# Altium PCB wsg1.0.PcbDoc (part 2 of 3)
Units mm, origin at the board's own origin, x right, y up, seen from the top; angles counter-clockwise.
Board outline 55.37 x 28.61 mm, 4 copper layers (F.Cu, In1.Cu, In2.Cu, B.Cu); 38 components, 55 nets, 181 pads, 63 vias.
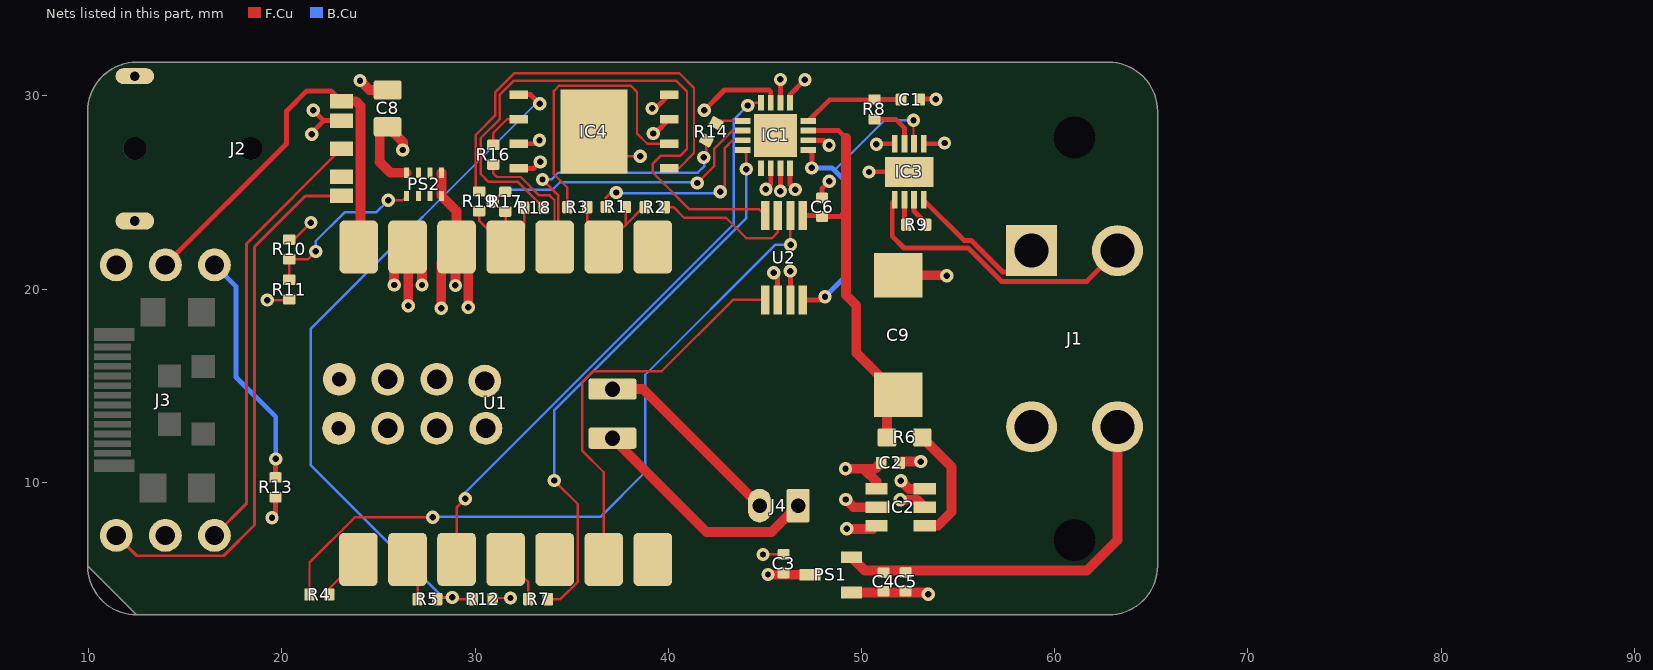
[diagram p4: the nets of this part, all layers, seen from the top]

## Design rules (kind name [scope] priority, off if disabled: settings) (continued)
27 further rules are at their usual default settings.

## Components (designator, comment, footprint, x,y, rotation, side; value= is the part's Value field where it differs from the comment)
C1 "10nF" C_0402_1005Metric 52.53,29.809 r0 top
C2 "0.1uF" C_0402_1005Metric 51.5,11.009 r0 top
C3 "1uF" C_0402_1005Metric 45.97,5.789 r90 top
C4 "1uF" C_0402_1005Metric 51.14,4.839 r270 top
C5 "10uF" C_0402_1005Metric 52.28,4.849 r270 top
C6 ".1uF" C_0402_1005Metric 47.96,24.229 r270 top
C8 "47uF" C_0805_2012Metric 25.47,29.349 r90 top
C9 "TAJD106M035RNJ" CAPPM7344X310N 51.9,17.619 r270 top
IC1 "ADS1120IRVAR" QFN50P350X350X100-17N-D 45.55,27.949 r90 top
IC2 "MCP1502T-50E_CHY" MCP1501-50 52.02,8.709 r180 top
IC3 "INA821IDRGR" SON50P300X300X80-9N-D 52.47,26.069 r90 top
IC4 "W25N04KVZEIR" SON127P800X600X80-9N-D 36.15,28.154 r0 top
J1 "ATF13-4P-BM13" DTF134PG003 58.8,21.989 r180 top
J2 "SJ-3541AS-SMT-TR-67" SJ3541ASSMTTR67 15.14,27.269 r0 top
J3 "USB_C_Plug_USB2.0" USB_C_PLACE 11.43,14.249 r90 top
J4 "Conn_01x02" JST_PH_S2B-PH-K_1x02_P2.00mm_Horizontal 46.72,8.789 r180 top
PS1 "AP2120N-2.5TRG1" SOT91P240X110-3N 48.4,5.209 r180 top
PS2 "TPSM83100SIUR" TPSM83100SIUR 27.36,25.419 r270 top
R1 "45.5" R_0402_1005Metric 37.28,24.249 r0 top
R2 "45.5" R_0402_1005Metric 39.3,24.239 r180 top
R3 "45.5" R_0402_1005Metric 35.29,24.239 r0 top
R4 "45.5" R_0402_1005Metric 21.94,4.189 r0 top
R5 "45.5" R_0402_1005Metric 27.53,3.949 r180 top
R6 "60" R_0603_1608Metric_Pad0.98x0.95mm_HandSolder 52.23,12.319 r0 top
R7 "45.5" R_0402_1005Metric 33.26,3.949 r180 top
R8 "1k" R_0402_1005Metric 50.67,29.299 r90 top
R9 "200" R_0402_1005Metric 52.83,23.329 r0 top
R10 "80.6k" R_0402_1005Metric 20.38,22.049 r270 top
R11 "806k" R_0402_1005Metric 20.38,19.969 r270 top
R12 "100k" R_0402_1005Metric 30.4,3.949 r180 top
R13 "5k" R_0402_1005Metric 19.67,9.739 r270 top
R14 "45.5" R_0402_1005Metric 42.22,28.139 r240 top
R16 "45.5" R_0402_1005Metric 30.94,26.949 r270 top
R17 "45.5" R_0402_1005Metric 31.56,24.519 r270 top
R18 "45.5" R_0402_1005Metric 33.05,24.199 r180 top
R19 "45.5" R_0402_1005Metric 30.21,24.539 r270 top
U1 "esp32 c6 xiao" "esp32 c6 smt" 31.558,14.291 r90 top
U2 "AD5626BRMZ" AD5626 45.99,21.619 r270 top

## Footprints (in the part's own frame and the unit in brackets; to place one, negate y for a bottom-side part, rotate by r counter-clockwise, add the part's x,y. Pads: shape width x height; smd on the part's side, far side on the other; paste and mask are expansions set on the pad)
AD5626 [mil]
  rect 59x17 smd mask+4.02: 1(-86,38) 2(-86,13) 3(-86,-13) 4(-86,-38) 5(86,-38) 6(86,-13) 7(86,13) 8(86,38)
  silkscreen extent -63,-63 63,63
C_0402_1005Metric [mm]
  rrect25% 0.56x0.62 smd mask+0: 1(-0.48,0) 2(0.48,0)
  silkscreen extent -0.11,-0.36 0.11,0.36
C_0805_2012Metric [mm]
  rrect25% 1x1.45 smd mask+0: 1(-0.95,0) 2(0.95,0)
  silkscreen extent -0.26,-0.73 0.26,0.73
CAPPM7344X310N [mm]
  rect 2.3x2.5 smd mask+0: 1(-3.1,0) 2(3.1,0)
  silkscreen extent -4.25,-2.17 3.65,2.17
DTF134PG003 [mm]
  rect 2.64x2.64 hole 1.76 paste-2539.97 mask+0: 1(0,0)
  round 2.64 hole 1.76 paste-2539.97 mask+0: 2(-4.45,0) 3(-4.45,9.12) 4(0,9.12)
  round 2.16 hole 2.16 paste-2539.97 mask+0: Un1(-2.223,14.974) Un2(-2.223,-5.856)
  silkscreen extent -30.1,-6.11 3.9,15.23
"esp32 c6 smt" [mm]
  rrect25% 2.75x2 smd mask+0.051: 1(-8.282,7.598) 2(-8.282,5.058) 3(-8.282,2.518) 4(-8.282,-0.022) 5(-8.282,-2.562) 6(-8.282,-5.102) 7(-8.282,-7.642) 8(7.883,-7.642) 9(7.883,-5.102) 10(7.883,-2.562) 11(7.883,-0.022) 12(7.883,2.518) 13(7.883,5.058) 14(7.883,7.58)
  rrect25% 1.1x2.5 hole 0.8 paste-2539.97 mask+0.051: 15(-2.008,-5.553) 16(0.532,-5.553)
  round 1.7 hole 0.762 paste-2539.97 mask+0: 17(-1.5,8.62) 18(1.04,8.592)
  round 1.7 hole 1 paste-2539.97 mask+0: 19(-1.5,6.08) 20(1.04,6.08) 21(-1.5,3.54) 22(1.04,3.54) 23(-1.5,1) 24(0.947,1.057)
  silkscreen extent -9.84,-10.44 8.66,12.69
JST_PH_S2B-PH-K_1x02_P2.00mm_Horizontal [mm]
  rrect21% 1.2x1.75 hole 0.75 paste-2539.97 mask+0: 1(0,0)
  rrect100% 1.2x1.75 hole 0.75 paste-2539.97 mask+0: 2(2,0)
  silkscreen extent -2.06,-6.36 4.06,1.46
MCP1501-50 [mm]
  rect 1.15x0.6 smd mask+0: 1(-1.25,0.95) 2(-1.25,0) 3(-1.25,-0.95) 4(1.25,-0.95) 5(1.25,0) 6(1.25,0.95)
  silkscreen extent -1.83,-1.45 0.33,1.6
QFN50P350X350X100-17N-D [mm]
  rect 0.8x0.3 smd mask+0: 1(-1.7,0.75) 2(-1.7,0.25) 3(-1.7,-0.25) 4(-1.7,-0.75) 9(1.7,-0.75) 10(1.7,-0.25) 11(1.7,0.25) 12(1.7,0.75)
  rect 0.3x0.8 smd mask+0: 5(-0.75,-1.7) 6(-0.25,-1.7) 7(0.25,-1.7) 8(0.75,-1.7) 13(0.75,1.7) 14(0.25,1.7) 15(-0.25,1.7) 16(-0.75,1.7)
  rect 2.24x2.24 smd mask+0: 17(0,0)
  silkscreen extent -2.22,1.37 -1.98,1.62
R_0402_1005Metric [mm]
  rrect25% 0.54x0.64 smd mask+0: 1(-0.51,0) 2(0.51,0)
  silkscreen extent -0.15,-0.38 0.15,0.38
R_0603_1608Metric_Pad0.98x0.95mm_HandSolder [mm]
  rrect25% 0.975x0.95 smd mask+0: 1(-0.913,0) 2(0.913,0)
  silkscreen extent -0.25,-0.52 0.25,0.52
SJ3541ASSMTTR67 [mm]
  rect 1.2x0.75 smd mask+0: 1(7.95,2.45) 2(7.95,-1.45) 3(7.95,0) 4(7.95,-2.45) 5(7.95,1.45)
  rrect100% 2x0.822 hole 0.5 slot 1.2 at 0 deg paste-2539.97 mask+0: MH1(-2.75,3.75)
  rrect100% 2x0.898 hole 0.5 slot 1.2 at 0 deg paste-2539.97 mask+0: MH2(-2.75,-3.75)
  round 1.2 hole 1.2 paste-2539.97 mask+0: Un1(-2.75,0) Un2(3.25,0)
  silkscreen extent -5.65,-4.4 9,4.4
SON50P300X300X80-9N-D [mm]
  rect 0.9x0.3 smd mask+0: 1(-1.45,0.75) 2(-1.45,0.25) 3(-1.45,-0.25) 4(-1.45,-0.75) 5(1.45,-0.75) 6(1.45,-0.25) 7(1.45,0.25) 8(1.45,0.75)
  rect 1.55x2.5 smd mask+0: 9(0,0)
  silkscreen extent -2.02,1.27 -1.78,1.52
SON127P800X600X80-9N-D [mm]
  rect 0.95x0.45 smd mask+0: 1(-3.9,1.905) 2(-3.9,0.635) 3(-3.9,-0.635) 4(-3.9,-1.905) 5(3.9,-1.905) 6(3.9,-0.635) 7(3.9,0.635) 8(3.9,1.905)
  rect 3.45x4.35 smd mask+0: 9(0,0)
  silkscreen extent -4.5,2.51 -4.25,2.75
SOT91P240X110-3N [mm]
  rect 1.09x0.61 smd mask+0.102: 1(-1.07,0.915) 2(-1.07,-0.915) 3(1.07,0)
  silkscreen extent -2.44,-1.45 0.65,1.45
TPSM83100SIUR [mm]
  rect 0.53x0.26 smd mask+0: 1(-0.6,0.9) 2(-0.6,0.3) 3(-0.6,-0.3) 4(-0.6,-0.9) 5(0.6,-0.9) 6(0.6,-0.3) 7(0.6,0.3) 8(0.6,0.9)
  silkscreen extent -1.5,0.85 -1.4,0.95
USB_C_PLACE [mm]
  round 1.7 hole 1 paste-2539.97 mask+0: 1(-7,0) 2(-7,-2.54) 3(-7,-5.08) 4(7,0) 5(7,-2.54) 6(7,-5.08)
  rect 0.35x1.9 smd mask+0: A1(2.75,0.2) A4(1.25,0.2) A5(0.75,0.2) A6(0.25,0.2) A7(-0.25,0.2) A10(-1.75,0.2) A11(-2.25,0.2) B2(-2.75,0.2) B3(-1.25,0.2) B5(-0.75,0.2) B9(1.75,0.2) B12(2.25,0.2)
  rect 1.5x1.4 smd mask+0: S1(-4.55,-4.4) S1(-4.55,-1.9) S1(4.55,-4.4)
  rect 0.65x2.1 smd mask+0: S1(-3.4,0.1) S1(3.4,0.1)
  rect 1.2x1.2 smd mask+0: S1(-1.75,-4.5) S1(-1.25,-2.75) S1(1.25,-2.75) S1(1.75,-4.5)
  rect 1.5x1.3 smd mask+0: S1(4.55,-1.9)
  silkscreen extent -4.2,-5.6 4.2,0.25

## Part data
C1 C2 C3 C4 C5 C6 C8: library part C, Sheetfile=wsg1.0.kicad_sch, ki_description="Unpolarized capacitor", ki_keywords="cap capacitor"
C9: Manufacturer_Name="Kyocera AVX", Mouser Part Number=581-TAJD106M035R, Height=3.1, Manufacturer_Part_Number=TAJD106M035RNJ, Mouser Price/Stock=https://www.mouser.co.uk/ProductDetail/KYOCERA-AVX/TAJD106M035RNJ?qs=srZBJ3srS4AUaIC0Brj4CQ%3D%3D, Sheetfile=wsg1.0.kicad_sch, ki_description="Tantalum Capacitors - Solid SMD 35volts 10uF 20%"
IC1: Manufacturer_Name="Texas Instruments", Mouser Part Number=595-ADS1120IRVAR, Height=1, Manufacturer_Part_Number=ADS1120IRVAR, Mouser Price/Stock=https://www.mouser.co.uk/ProductDetail/Texas-Instruments/ADS1120IRVAR?qs=%2Fd%252BFzHvH4c2AzmjDnnpHRQ%3D%3D, Sheetfile=wsg1.0.kicad_sch, ki_description="16-bit, 2-kSPS, 4-ch, low-power, small-size delta-sigma ADC with PGA, VREF, 2x IDACs & SPI interface"
IC2: library part MCP1501T-50E_CHY, Manufacturer_Name=Microchip, Manufacturer_Part_Number=MCP1501T-50E/CHY, Mouser Part Number=579-MCP1501T-50E/CHY, Height=1.45, Mouser Price/Stock=https://www.mouser.co.uk/ProductDetail/Microchip-Technology/MCP1501T-50E-CHY?qs=Li%252BoUPsLEnt6h%2FnXwes%252BxQ%3D%3D, Sheetfile=wsg1.0.kicad_sch, ki_description="Series Voltage Reference IC Fixed 5V V +/-0.1% 20 mA SOT-23-6"
IC3: Manufacturer_Name="Texas Instruments", Mouser Part Number=595-INA821IDRGR, Description="Instrumentation Amplifiers High bandwidth (4.7MHz), low noise (7nV/vHz), precision (35 V), low-power, instrumentation amp", Height=0.8, Manufacturer_Part_Number=INA821IDRGR, Mouser Price/Stock=https://www.mouser.co.uk/ProductDetail/Texas-Instruments/INA821IDRGR?qs=LDGDZb5k%2F%252B%2Foo4X%252BEQr4FA%3D%3D, Sheetfile=wsg1.0.kicad_sch, ki_description="Instrumentation Amplifiers High bandwidth (4.7MHz), low noise (7nV/vHz), precision (35 V), low-power, instrumentation amp"
IC4: Manufacturer_Name=Winbond, Mouser Part Number=454-W25N04KVZEIR, Height=0.8, Manufacturer_Part_Number=W25N04KVZEIR, Mouser Price/Stock=https://www.mouser.co.uk/ProductDetail/Winbond/W25N04KVZEIR?qs=YwPsRIUVAOdveyibmg1m8Q%3D%3D, Sheetfile=wsg1.0.kicad_sch, ki_description="FLASH - NAND Memory IC 4Gbit SPI - Quad I/O 104 MHz 8-WSON (8x6)"
J1: library part DTF13-4P-G003, Manufacturer_Name="TE Connectivity", Mouser Part Number=571-DTF13-4P-G003, Height=23.52, Manufacturer_Part_Number=DTF13-4P-G003, Mouser Price/Stock=https://www.mouser.co.uk/ProductDetail/TE-Connectivity-DEUTSCH/DTF13-4P-G003?qs=cgQJD%2FpJz0wMj4JqThO4Bw%3D%3D, Sheetfile=wsg1.0.kicad_sch, ki_description="Body Features: Primary Product Color Black | Configuration Features: Number of Sections 1 | Number of Rows 2 | Number of Positions 4 | PCB Mount Orientation Right Angle | Number of Signal Positions 4 | Contact Features: Mating Pin Diameter .063 INCH | Contact Type Pin | Contact Mating Area Plating Material Gold | Contact Current Rating (Max) 13 AMP | Contact Size Size 16 | Mating Pin Diameter 1.59 MM | Dimensions: Connector Width 27.18 MM | PCB Thickness (Recommended) .78  2.36 MM | Connector Length 1.31"
J2: Manufacturer_Name="Same Sky", Arrow Part Number=SJ-3541AS-SMT-TR-67, Arrow Price/Stock=https://www.arrow.com/en/products/sj-3541as-smt-tr-67/cui-devices, Height=5.65, Manufacturer_Part_Number=SJ-3541AS-SMT-TR-67, Sheetfile=wsg1.0.kicad_sch, ki_description="Stereo Jack, IP67, 3.5, 5 conductor, smt,  no switches, shield, T&R package"
J3: library part UCB_C_PLACE, Sheetfile=wsg1.0.kicad_sch
PS1: library part AP2120N-5.0TRG1, Manufacturer_Name="Diodes Incorporated", Mouser Part Number=621-AP2120N-5.0TRG1, Height=1.2, Manufacturer_Part_Number=AP2120N-5.0TRG1, Mouser Price/Stock=https://www.mouser.co.uk/ProductDetail/Diodes-Incorporated/AP2120N-5.0TRG1?qs=M%2FOdCRO8QQ3JQu49DdtyIA%3D%3D, Sheetfile=wsg1.0.kicad_sch, ki_description="Lin Reg 5V 150MA SOT23 for wsg"
PS2: Manufacturer_Name="Texas Instruments", Mouser Part Number=595-TPSM83100SIUR, Height=1.2, Manufacturer_Part_Number=TPSM83100SIUR, Mouser Price/Stock=https://www.mouser.co.uk/ProductDetail/Texas-Instruments/TPSM83100SIUR?qs=17ckDYBRdembJwsYYPsw7Q%3D%3D, Sheetfile=wsg1.0.kicad_sch, ki_description="5.5v Boost Converter for wsg"
R1 R2 R3 R4 R5 R6 R7 R8 R9 R10 R11 R12 R13 R14 R16 R17 R18 R19: library part R, Sheetfile=wsg1.0.kicad_sch, ki_description=Resistor, ki_keywords="R res resistor"
U1: library part 102010388, MANUFACTURER="Seeed Technology", MAXIMUM_PACKAGE_HEIGHT=N/A, Package=None, Availability="In Stock", Check_prices=https://www.snapeda.com/parts/102010388/Seeed+Studio/view-part/?ref=eda, Description="\n                        \n                            Seeeduino XIAO Development Board, Pre-Soldered [Seeed Studio] 102010388 Seeeduino XIAO Development Board, Pre-Soldered\n                        \n", MF="Seeed Technology Co., Ltd", MP=102010388, PARTREV=N/A, Price=None, SNAPEDA_PN=102010388, STANDARD="Manufacturer Recommendations", Sheetfile=wsg1.0.kicad_sch, SnapEDA_Link=https://www.snapeda.com/parts/102010388/Seeed+Studio/view-part/?ref=snap
J4: Sheetfile=wsg1.0.kicad_sch, ki_description="Generic connector, single row, 01x02, script generated (kicad-library-utils/schlib/autogen/connector/)", ki_keywords=connector
U2: Sheetfile=wsg1.0.kicad_sch, ki_description="DAC for wsg, main", ki_keywords=AD5626BRMZ

## Via types
v1: diameter 0.686, hole 0.33, F.Cu to B.Cu, tented both sides, 63 vias

## Nets (pads, with @x,y where several pads share a name; then routed paths per layer and width w, separated by ;. In a path a pad name is that pad's centre, name@x,y a point inside that pad or via, vN(x,y) a via of type N, cw(c..) or ccw(c..) an arc to the next point about the centre after c; other vN are vias at no path point)
"2V5 Ref": C4.1 C5.1 IC1.9 J1.3 PS1.2 | length 22.1
  F.Cu w0.254: IC1.9@46.3,29.649 46.3,30.059 v1(47.07,30.829)
  F.Cu w0.508: PS1.2@49.47,6.124 50.165,5.429 61.677,5.429 63.25,7.002 J1.3@63.25,12.869
3V3: IC1.11 IC4.3 IC4.7 IC4.8 PS2.1 PS2.8 R12.1 U1.12 | length 21.8
  F.Cu w0.127: R12.1@30.91,3.949 30.97,4.009 v1(31.83,4.009)
  F.Cu w0.254: IC4.3@32.25,27.519 33.15,27.519 v1(33.33,27.699) ; v1(39.16,29.349) 39.34,29.349 IC4.8@40.05,30.059 ; v1(39.22,28.052) 39.313,28.052 IC4.7@40.05,28.789 ; v1(41.863,29.259) 42.907,30.303 45.204,30.303 45.3,30.207 IC1.11@45.3,29.649
  F.Cu w0.508: v1(28.25,19.009) 28.25,21.384 U1.12@28.98,22.114 ; PS2.1@28.26,26.019 PS2.8@28.26,24.819 29.04,24.039 U1.12@29.04,22.174 ; v1(28.98,20.189) U1.12@28.98,22.114 ; v1(29.65,19.059) 29.65,21.564 U1.12@29.04,22.174 ; U1.12@28.98,22.114 U1.12@29.04,22.174
5V5: C2.1 C3.1 C8.1 IC1.10 IC2.4 IC2.6 IC3.8 PS1.3 PS2.4 R11.2 U2.6 | length 17
  F.Cu w0.127: v1(19.24,19.429) 20.35,19.429 R11.2@20.38,19.459
  F.Cu w0.254: v1(45.46,20.839) 45.66,20.639 U2.6@45.66,19.435 ; IC1.10@45.8,29.649 v1(45.8,30.849) ; v1(50.77,27.489) 50.8,27.519 IC3.8@51.72,27.519
  F.Cu w0.508: v1(26.26,27.199) 26.26,27.609 C8.1@25.47,28.399 25.06,27.989 25.06,26.599 25.05,26.589 25.62,26.019 PS2.4@26.46,26.019 ; v1(45.16,5.229) 45.18,5.209 PS1.3@47.33,5.209 ; v1(49.17,10.699) 50.11,10.699 ; v1(49.23,7.589) 50.6,7.589 IC2.6@50.77,7.759 ; IC2.4@50.77,9.659 50.77,10.039 50.11,10.699 ; C2.1@51.02,11.009 50.71,10.699 50.11,10.699
"5V Reference": C6.2 C9.2 IC1.7 R6.1 U2.1 | length 21.3
  F.Cu w0.254: U2.1@46.955,23.804 47.906,23.804 C6.2@47.96,23.749 49.051,23.749 49.106,23.804 ; IC1.7@47.25,28.199 48.82,28.199 49.19,27.829
  F.Cu w0.508: 49.106,23.804 49.19,23.719 ; 49.19,27.829 49.19,23.719 ; R6.1@51.317,12.319 51.317,13.937 C9.2@51.9,14.519 49.73,16.689 49.73,19.159 49.19,19.699 49.19,23.719
"5V USB": J2.1 J3.5 U1.14 | length 22.5
  F.Cu w0.254: J3.5@13.97,21.249 20.24,27.519 20.24,29.209 21.29,30.259 22.55,30.259 J2.1@23.09,29.719 J2.1@23.573,29.719
  F.Cu w0.508: J2.1@23.573,29.719 23.827,29.719 24.071,29.475 24.071,22.267 U1.14@23.978,22.174
"ADC DReady": IC1.12 U1.3 | length 30.5
  F.Cu w0.127: U1.3@29.04,6.009 29.04,8.699 v1(29.49,9.149) ; v1(44.11,29.499) 44.26,29.649 IC1.12@44.8,29.649
  B.Cu w0.127: v1(29.49,9.149) 29.49,9.476 43.393,23.38 43.393,28.783 v1(44.11,29.499)
AmplifiedSig: IC3.7 R8.1 | length 2.6
  F.Cu w0.254: R8.1@50.67,28.789 51.775,28.789 52.22,28.345 IC3.7@52.22,27.519
BAT+: J4.2 U1.16 | length 10.1
  F.Cu w0.508: U1.16@37.112,14.823 38.686,14.823 J4.2@44.72,8.789
BAT-: J4.1 U1.15 | length 12.2
  F.Cu w0.508: U1.15@37.112,12.283 41.975,7.419 45.35,7.419 J4.1@46.72,8.789
CS-ADC: IC1.16 R7.1 | length 29
  F.Cu w0.127: R7.1@33.77,3.949 34.419,3.949 35.311,4.841 35.311,8.869 v1(34.09,10.089) ; IC1.16@43.85,27.199 44.03,27.019 v1(44.03,26.209)
  B.Cu w0.127: v1(34.09,10.089) 34.09,13.717 44.03,23.657 v1(44.03,26.209)
CS-DAC: R4.1 U2.2 | length 37.8
  F.Cu w0.127: R4.1@21.43,4.189 21.43,5.838 23.781,8.189 v1(27.81,8.189) ; U2.2@46.32,23.804 46.32,22.309 v1(46.33,22.299)
  B.Cu w0.127: v1(27.81,8.189) 27.83,8.209 36.49,8.209 38.804,10.523 38.804,15.563 45.54,22.299 v1(46.33,22.299)
CS-MEM: IC4.1 R5.1 R12.2 | length 37.1
  F.Cu w0.127: R5.1@28.04,3.949 28.13,4.039 v1(28.82,4.039) 28.91,3.949 R12.2@29.89,3.949
  F.Cu w0.254: IC4.1@32.25,30.059 32.87,30.059 v1(33.34,29.589)
  B.Cu w0.127: v1(28.82,4.039) 28.34,4.039 21.49,10.889 21.49,17.939 33.14,29.589 v1(33.34,29.589)
"DAC Bias": IC1.5 IC3.6 U2.8 | length 17
  F.Cu w0.127: v1(52.69,28.739) 52.69,27.549 IC3.6@52.72,27.519
  F.Cu w0.254: U2.8@46.955,19.435 47.946,19.435 v1(48.11,19.599) ; IC1.5@47.25,27.199 47.43,27.019 v1(47.43,26.269)
  B.Cu w0.127: 48.602,26.151 51.19,28.739 v1(52.69,28.739)
  B.Cu w0.254: v1(47.43,26.269) 48.484,26.269 48.602,26.151 49.12,25.633 49.12,20.609 v1(48.11,19.599)
FilteredSig: C1.1 IC1.8 R8.2 | length 5.3
  F.Cu w0.254: IC1.8@47.25,28.699 48.35,29.799 50.66,29.799 R8.2@50.67,29.809 C1.1@52.05,29.809
GNDA: C1.2 C2.2 C3.2 C4.2 C5.2 C6.1 C8.2 C9.1 IC1.2 IC1.3 IC1.4 IC1.6 IC2.2 IC2.3 IC2.5 IC3.5 IC3.9 IC4.4 IC4.9 J1.4 J2.5 J3.2 J3.4 PS1.1 PS2.2 PS2.3 PS2.6 PS2.7 R10.1 R13.2 U1.13 U2.7 | length 43.2
  F.Cu w0.127: R10.1@20.38,22.559 20.62,22.559 v1(21.5,23.439) ; IC4.9@36.15,28.154 37.425,26.879 v1(38.55,26.879) ; v1(44.9,6.259) 44.91,6.269 C3.2@45.97,6.269
  F.Cu w0.254: v1(19.49,8.159) 19.67,8.339 R13.2@19.67,9.229 ; v1(21.54,28.009) 21.54,28.099 22.16,28.719 ; v1(21.62,29.259) 22.16,28.719 ; J2.5@23.09,28.719 22.16,28.719 ; IC4.4@32.25,26.249 33.04,26.249 v1(33.373,26.582) ; v1(45.05,25.169) 45.3,25.419 IC1.2@45.3,26.249 ; v1(45.8,25.069) IC1.3@45.8,26.249 ; IC1.4@46.3,26.249 46.3,25.419 v1(46.57,25.149) ; v1(46.31,20.929) 46.32,20.919 U2.7@46.32,19.435 ; IC1.6@47.25,27.699 48.07,27.699 v1(48.32,27.449) ; C6.1@47.96,24.709 47.96,25.209 v1(48.33,25.579) ; v1(50.39,26.059) 50.4,26.069 IC3.9@52.47,26.069 ; C1.2@53.01,29.809 53.03,29.829 v1(53.85,29.829) ; IC3.5@53.22,27.519 54.26,27.519 v1(54.3,27.559)
  F.Cu w0.508: v1(24.04,30.789) 24.53,30.299 C8.2@25.47,30.299 ; v1(25.81,20.209) 25.81,21.484 U1.13@26.5,22.174 U1.13@26.54,22.134 ; v1(26.54,19.139) U1.13@26.54,22.134 ; v1(27.25,20.209) 27.25,21.424 U1.13@26.54,22.134 ; v1(49.19,9.109) 49.59,8.709 IC2.5@50.77,8.709 ; PS1.1@49.47,4.294 53.365,4.294 v1(53.46,4.199) ; C9.1@51.9,20.719 54.38,20.719 v1(54.41,20.689) ; C2.2@51.98,11.009 52.04,11.069 v1(53.06,11.069) ; v1(52.01,9.099) 52.88,9.099 IC2.2@53.27,8.709 ; v1(52.04,10.079) 52.46,9.659 IC2.3@53.27,9.659
LDAC-DAC: U1.6 U2.5 | length 20.9
  F.Cu w0.127: U1.6@36.66,6.009 36.66,10.519 35.54,11.639 35.54,15.167 36.122,15.749 39.66,15.749 43.346,19.435 U2.5@45.025,19.435
MISO: R14.2 R16.2 U1.10 | length 20.6
  F.Cu w0.127: R16.2@30.94,26.439 30.94,25.989 31.13,25.799 32.36,25.799 33.31,24.849 33.86,24.849 34.11,24.599 34.11,22.184 U1.10@34.12,22.174 34.31,22.364 34.31,24.849 33.49,25.669 v1(33.49,25.673) ; v1(41.834,26.814) 41.965,26.945 R14.2@41.965,27.697
  B.Cu w0.127: v1(33.49,25.673) 33.953,25.673 34.3,26.019 41.52,26.019 41.85,26.349 41.85,26.798 v1(41.834,26.814)
MISO_ADC: IC1.13 R14.1 | length 1.4
  F.Cu w0.127: R14.1@42.475,28.581 42.593,28.699 IC1.13@43.85,28.699
MISO_FLASH: IC4.2 R16.1 | length 2.2
  F.Cu w0.127: R16.1@30.94,27.459 30.94,28.069 31.66,28.789 IC4.2@32.25,28.789
MOSI: R17.2 R18.2 R19.2 U1.11 | length 6.8
  F.Cu w0.127: R19.2@30.21,24.029 30.21,23.544 U1.11@31.58,22.174 ; R17.2@31.55,23.989 31.5,23.989 R17.2@31.56,23.929 ; R17.2@31.56,24.009 R17.2@31.56,23.929 ; R18.2@32.54,24.199 32.54,23.134 U1.11@31.58,22.174 ; R17.2@31.56,23.929 31.58,23.909 U1.11@31.58,22.174
MOSI_ADC: IC1.14 R17.1 | length 16
  F.Cu w0.127: v1(30.903,24.525) 31.407,25.029 R17.1@31.56,25.029 31.54,25.049 R17.1@31.43,25.049 ; v1(41.498,25.486) 42.367,26.355 42.367,27.244 43.323,28.199 IC1.14@43.85,28.199
  B.Cu w0.127: v1(30.903,24.525) 31.517,25.139 34.01,25.139 34.4,25.529 41.455,25.529 v1(41.498,25.486)
MOSI_DAC: R18.1 U2.4 | length 31
  F.Cu w0.127: R18.1@33.56,24.199 32.214,25.545 30.694,25.545 30.294,25.945 30.294,27.814 31.286,28.806 31.286,30.065 32.01,30.789 40.4,30.789 40.966,30.223 40.966,27.255 40.6,26.889 39.6,26.889 39.2,26.489 39.2,26.018 41.099,24.119 44.709,24.119 U2.4@45.025,23.804
MOSI_FLASH: IC4.5 R19.1 | length 21.6
  F.Cu w0.127: R19.1@30.21,25.049 30.04,25.219 30.04,27.989 31.032,28.981 31.032,30.17 32.037,31.176 40.564,31.176 41.33,30.409 41.33,27.039 40.54,26.249 IC4.5@40.05,26.249
Net-(IC2-OUT): IC2.1 R6.2 | length 6.2
  F.Cu w0.508: R6.2@53.142,12.319 54.66,10.802 54.66,8.466 53.953,7.759 IC2.1@53.27,7.759
Net-(IC3-RG_1): IC3.2 R9.1 | length 1.3
  F.Cu w0.254: IC3.2@52.22,24.619 52.22,23.429 R9.1@52.32,23.329
Net-(IC3-RG_2): IC3.3 R9.2 | length 1.5
  F.Cu w0.254: IC3.3@52.72,24.619 52.72,24.011 53.34,23.391 R9.2@53.34,23.329
Net-(J3-CC): J3.6 R13.1 | length 12.3
  F.Cu w0.254: R13.1@19.67,10.249 19.67,11.199 v1(19.68,11.209)
  B.Cu w0.254: J3.6@16.51,21.249 17.62,20.139 17.62,15.449 19.68,13.389 v1(19.68,11.209)
Net-(PS2-FB): PS2.5 R10.2 R11.1 | length 8.8
  F.Cu w0.127: R11.1@20.38,20.479 R10.2@20.38,21.539 21.34,21.539 v1(21.75,21.949) ; v1(25.51,24.599) 26.24,24.599 PS2.5@26.46,24.819
  B.Cu w0.127: v1(21.75,21.949) 21.75,22.479 23.24,23.969 24.88,23.969 v1(25.51,24.599)
Net-(U1-PA02_A0_D0): R4.2 U1.1 | length 2.4
  F.Cu w0.127: R4.2@22.45,4.189 22.45,4.499 U1.1@23.96,6.009
Net-(U1-PA4_A1_D1): R5.2 U1.2 | length 2.3
  F.Cu w0.127: U1.2@26.5,6.009 27.02,5.489 R5.2@27.02,3.949
Net-(U1-PA11_A3_D3): R7.2 U1.4 | length 2.5
  F.Cu w0.127: U1.4@31.58,6.009 32.75,4.839 R7.2@32.75,3.949
S+: IC3.4 J1.1 | length 7.6
  F.Cu w0.254: IC3.4@53.22,24.619 53.22,24.599 55.309,22.51 55.674,22.51 57.295,20.889 57.7,20.889 J1.1@58.8,21.989
S-: IC3.1 J1.2 | length 15.2
  F.Cu w0.254: IC3.1@51.72,24.619 51.59,24.489 51.59,22.729 52.196,22.123 55.522,22.123 57.246,20.399 61.66,20.399 J1.2@63.25,21.989
SCLK: R1.2 R2.2 R3.2 U1.9 | length 6.4
  F.Cu w0.127: R3.2@35.8,24.239 35.8,23.034 U1.9@36.66,22.174 37.79,23.304 ; R1.2@37.79,24.249 37.79,23.304 ; R2.2@38.79,24.239 38.725,24.239 37.79,23.304
SCLK_ADC: IC1.15 R1.1 | length 10
  F.Cu w0.127: R1.1@36.77,24.249 36.77,24.739 37.06,25.029 v1@37.3,25.029 ; v1(42.685,25.034) 42.93,25.279 42.93,27.306 43.323,27.699 IC1.15@43.85,27.699
  B.Cu w0.127: v1(37.31,24.996) 37.353,24.953 42.604,24.953 v1(42.685,25.034)
SCLK_DAC: R2.1 U2.3 | length 7.5
  F.Cu w0.127: R2.1@39.81,24.239 40.27,24.239 40.82,23.689 42.98,23.689 44.04,22.629 45.362,22.629 45.66,22.927 U2.3@45.66,23.804
SCLK_FLASH: IC4.6 R3.1 | length 14.9
  F.Cu w0.127: R3.1@34.78,24.239 34.78,25.243 34.08,25.943 34.08,30.259 34.341,30.52 38.065,30.52 38.38,30.205 38.38,28.049 38.91,27.519 IC4.6@40.05,27.519
unconnected-(IC1-CLK-Pad1): IC1.1
unconnected-(IC1-EP-Pad17): IC1.17
unconnected-(J2-PadMH1): J2.MH1
unconnected-(J2-PadMH2): J2.MH2
unconnected-(J2-TIP_1-Pad2): J2.2
unconnected-(U1-3v3-Pad23): U1.23
unconnected-(U1-BOOT-Pad24): U1.24
unconnected-(U1-EN-Pad20): U1.20
unconnected-(U1-GND-Pad19): U1.19
unconnected-(U1-MTCK-Pad21): U1.21
unconnected-(U1-MTDI-Pad18): U1.18
unconnected-(U1-MTDO-Pad17): U1.17
unconnected-(U1-MTMS-Pad22): U1.22
unconnected-(U1-PA8_A4_D4_SDA-Pad5): U1.5
unconnected-(U1-PB08_A6_D6_TX-Pad7): U1.7
unconnected-(U1-PB09_A7_D7_RX-Pad8): U1.8
USB_D+: J2.3 J3.3 | length 22.7
  F.Cu w0.152: J3.3@16.51,7.249 18.177,8.916 18.177,22.356 J2.3@23.09,27.269
USB_D-: J2.4 J3.1 | length 28.2
  F.Cu w0.152: J3.1@11.43,7.249 12.483,6.196 16.987,6.196 18.583,7.792 18.583,22.188 21.215,24.819 J2.4@23.09,24.819
pads on no net: J1.Un1 J1.Un2 J2.Un1 J2.Un2 J3.A1 J3.A4 J3.A5 J3.A6 J3.A7 J3.A10 J3.A11 J3.B2 J3.B3 J3.B5 J3.B9 J3.B12 J3.S1

## Polygon pours and split planes (outlines as drawn)
"DAC Bias" on F.Cu "F.Cu-DAC Bias-5" (solid, remove dead copper, pour order 30418): 52.754,28.119 52.627,28.119 52.57,27.969 52.72,27.518 52.848,27.969
"DAC Bias" on F.Cu "F.Cu-DAC Bias-4" (solid, remove dead copper, pour order 30299): 47.557,26.955 47.303,26.955 47.113,26.4 47.43,26.268 47.747,26.4
Net-(PS2-FB) on F.Cu "F.Cu-Net-(PS2-FB)-5" (solid, remove dead copper, pour order 30429): 26.237,24.663 26.237,24.536 26.377,24.554 26.461,24.819 26.33,24.873
CS-DAC on F.Cu "F.Cu-CS-DAC-3" (solid, remove dead copper, pour order 30329): 27.124,8.253 27.124,8.126 27.679,7.872 27.811,8.189 27.679,8.506
MOSI on F.Cu "F.Cu-MOSI-5" (solid, remove dead copper, pour order 30256): 31.545,24.034 31.455,23.944 30.726,23.403 31.581,22.173 32.434,23.403
GNDA on F.Cu "F.Cu-GNDA-48" (solid, remove dead copper, pour order 30320): 46.427,25.723 46.173,25.723 46.227,25.149 46.57,25.148 46.812,25.392
MOSI_FLASH on F.Cu "F.Cu-MOSI_FLASH-1" (solid, remove dead copper, pour order 30390): 30.104,25.589 29.977,25.589 29.9,25.236 30.21,25.048 30.409,25.316
FilteredSig on F.Cu "F.Cu-FilteredSig-3" (solid, remove dead copper, pour order 30351): 51.49,29.936 51.49,29.682 51.827,29.529 52.051,29.809 51.827,30.089
CS-ADC on F.Cu "F.Cu-CS-ADC-3" (solid, remove dead copper, pour order 30386): 34.31,3.886 34.31,4.013 34.007,4.219 33.769,3.949 34.007,3.679
GNDA on F.Cu "F.Cu-GNDA-47" (solid, remove dead copper, pour order 30307): 46.193,20.245 46.447,20.245 46.627,20.798 46.31,20.93 45.993,20.798
SCLK_ADC on F.Cu "F.Cu-SCLK_ADC-3" (solid, remove dead copper, pour order 30361): 36.707,24.689 36.834,24.689 37.31,24.653 37.31,24.997 36.993,25.127
"5V Reference" on F.Cu "F.Cu-5V Reference-7" (solid, remove dead copper, pour order 30209): 50.223,16.556 49.863,16.197 50.65,14.355 51.901,14.518 52.164,15.669
3V3 on F.Cu "F.Cu-3V3-15" (solid, remove dead copper, pour order 30275): 28.504,19.695 27.996,19.695 27.907,19.009 28.25,19.008 28.593,19.009
MOSI on F.Cu "F.Cu-MOSI-4" (solid, remove dead copper, pour order 30384): 31.517,23.469 31.644,23.469 31.839,23.778 31.56,24.01 31.299,23.766
5V5 on F.Cu "F.Cu-5V5-15" (solid, remove dead copper, pour order 30316): 45.533,20.225 45.787,20.225 45.803,20.839 45.46,20.84 45.218,20.597
MISO_ADC on F.Cu "F.Cu-MISO_ADC-1" (solid, remove dead copper, pour order 30419): 43.3,28.763 43.3,28.636 43.45,28.549 43.851,28.699 43.45,28.849
GNDA on F.Cu "F.Cu-GNDA-46" (solid, remove dead copper, pour order 30286): 52.793,4.548 52.793,4.04 53.329,3.882 53.461,4.199 53.46,4.542
3V3 on F.Cu "F.Cu-3V3-14" (solid, remove dead copper, pour order 30273): 29.234,20.875 28.726,20.875 28.637,20.189 28.98,20.188 29.323,20.189
GNDA on F.Cu "F.Cu-GNDA-45" (solid, remove dead copper, pour order 30340): 46.447,20.4 46.193,20.4 46.104,20.184 46.32,19.434 46.536,20.184
GNDA on F.Cu "F.Cu-GNDA-44" (solid, remove dead copper, pour order 30215): 26.286,19.799 26.794,19.799 27.462,21.108 26.5,22.175 25.538,21.108
GNDA on F.Cu "F.Cu-GNDA-43" (solid, remove dead copper, pour order 30290): 49.895,8.963 49.895,8.455 50.195,8.409 50.771,8.709 50.195,9.009
MISO on F.Cu "F.Cu-MISO-5" (solid, remove dead copper, pour order 30396): 30.959,25.881 31.049,25.97 31.22,26.209 30.939,26.44 30.699,26.182
"2V5 Ref" on F.Cu "F.Cu-2V5 Ref-3" (solid, remove dead copper, pour order 30304): 46.495,30.434 46.675,30.254 47.201,30.512 47.071,30.83 46.753,30.96
3V3 on F.Cu "F.Cu-3V3-13" (solid, remove dead copper, pour order 30241): 28.859,24.579 28.5,24.22 28.078,23.24 29.041,22.173 29.85,23.432
GNDA on F.Cu "F.Cu-GNDA-42" (solid, remove dead copper, pour order 30336): 45.584,6.206 45.584,6.333 45.031,6.576 44.899,6.259 45.031,5.942
Net-(U1-PA4_A1_D1) on F.Cu "F.Cu-Net-(U1-PA4_A1_D1)-1" (solid, remove dead copper, pour order 30374): 27.083,4.539 26.956,4.539 26.76,4.186 27.02,3.948 27.28,4.186
MOSI_ADC on F.Cu "F.Cu-MOSI_ADC-3" (solid, remove dead copper, pour order 30332): 42.028,25.926 41.938,26.016 41.367,25.803 41.498,25.485 41.815,25.355
"5V USB" on F.Cu "F.Cu-5V USB-5" (solid, remove dead copper, pour order 30285): 22.408,30.386 22.408,30.132 22.49,29.716 23.091,29.719 23.221,30.094
AmplifiedSig on F.Cu "F.Cu-AmplifiedSig-1" (solid, remove dead copper, pour order 30409): 52.347,28.119 52.093,28.119 52.07,27.969 52.22,27.518 52.37,27.969
GNDA on F.Cu "F.Cu-GNDA-41" (solid, remove dead copper, pour order 30323): 37.864,26.943 37.864,26.816 38.419,26.562 38.551,26.879 38.419,27.196
GNDA on F.Cu "F.Cu-GNDA-40" (solid, remove dead copper, pour order 30211): 38.55,26.816 38.55,26.943 37.875,28.37 36.149,28.154 37.875,26.105
SCLK on F.Cu "F.Cu-SCLK-5" (solid, remove dead copper, pour order 30253): 35.863,24.239 35.736,24.239 35.66,23.049 36.66,22.173 37.171,23.547
5V5 on F.Cu "F.Cu-5V5-14" (solid, remove dead copper, pour order 30293): 46.48,5.463 46.48,4.955 46.785,4.904 47.331,5.209 46.785,5.514
SCLK_FLASH on F.Cu "F.Cu-SCLK_FLASH-1" (solid, remove dead copper, pour order 30379): 39.35,27.583 39.35,27.456 39.575,27.294 40.051,27.519 39.575,27.744
BAT- on F.Cu "F.Cu-BAT--1" (solid, remove dead copper, pour order 30263): 37.871,11.164 38.23,11.523 38.312,11.86 37.111,12.283 36.884,11.733
MISO on F.Cu "F.Cu-MISO-4" (solid, remove dead copper, pour order 30346): 42.029,27.473 41.902,27.473 41.592,27.056 41.834,26.813 42.151,26.945
FilteredSig on F.Cu "F.Cu-FilteredSig-2" (solid, remove dead copper, pour order 30354): 50.08,29.926 50.08,29.672 50.433,29.549 50.671,29.809 50.433,30.069
MOSI_ADC on F.Cu "F.Cu-MOSI_ADC-2" (solid, remove dead copper, pour order 30331): 31.433,24.965 31.343,25.055 30.772,24.842 30.902,24.524 31.22,24.394
MOSI_FLASH on F.Cu "F.Cu-MOSI_FLASH" (solid, remove dead copper, pour order 30402): 40.733,26.353 40.644,26.443 40.525,26.474 40.049,26.248 40.525,26.128
GNDA on F.Cu "F.Cu-GNDA-39" (solid, remove dead copper, pour order 30219): 54.15,20.465 54.15,20.973 53.15,21.719 51.899,20.719 53.15,19.719
"5V Reference" on F.Cu "F.Cu-5V Reference-6" (solid, remove dead copper, pour order 30403): 47.387,23.677 47.387,23.931 47.171,24.019 46.954,23.804 47.171,23.588
GNDA on F.Cu "F.Cu-GNDA-38" (solid, remove dead copper, pour order 30302): 22.015,28.684 22.195,28.864 21.937,29.39 21.619,29.26 21.489,28.942
"5V USB" on F.Cu "F.Cu-5V USB-4" (solid, remove dead copper, pour order 30217): 24.325,24.549 23.817,24.549 23.019,23.245 23.978,22.173 24.94,23.24
GNDA on F.Cu "F.Cu-GNDA-37" (solid, remove dead copper, pour order 30291): 49.71,8.455 49.71,8.963 49.432,9.352 49.189,9.109 49.059,8.792
3V3 on F.Cu "F.Cu-3V3-12" (solid, remove dead copper, pour order 30362): 32.95,27.392 32.95,27.646 32.725,27.744 32.249,27.519 32.725,27.294
Net-(U1-PA02_A0_D0) on F.Cu "F.Cu-Net-(U1-PA02_A0_D0)-1" (solid, remove dead copper, pour order 30398): 22.696,4.655 22.606,4.745 22.283,4.503 22.449,4.188 22.72,4.374
"5V Reference" on F.Cu "F.Cu-5V Reference-5" (solid, remove dead copper, pour order 30349): 47.37,23.931 47.37,23.677 47.721,23.49 47.961,23.749 47.736,24.018
USB_D+ on F.Cu "F.Cu-USB_D+-1" (solid, remove dead copper, pour order 30284): 22.396,26.683 22.504,26.575 23.245,26.894 23.091,27.27 22.49,27.199
GNDA on F.Cu "F.Cu-GNDA-36" (solid, remove dead copper, pour order 30266): 24.508,30.68 24.149,30.321 24.793,29.911 25.471,30.298 24.899,30.78
USB_D- on F.Cu "F.Cu-USB_D--1" (solid, remove dead copper, pour order 30259): 12.694,6.12 12.694,6.272 12.215,7.574 11.429,7.249 11.105,6.464
MISO_FLASH on F.Cu "F.Cu-MISO_FLASH-1" (solid, remove dead copper, pour order 30387): 31.004,27.999 30.877,27.999 30.67,27.697 30.94,27.458 31.21,27.697
LDAC-DAC on F.Cu "F.Cu-LDAC-DAC-1" (solid, remove dead copper, pour order 30243): 36.724,8.384 36.597,8.384 35.806,7.238 36.66,6.008 37.514,7.238
3V3 on F.Cu "F.Cu-3V3-11" (solid, remove dead copper, pour order 30383): 31.45,3.946 31.45,4.073 31.119,4.244 30.909,3.949 31.165,3.706
MISO on F.Cu "F.Cu-MISO-3" (solid, remove dead copper, pour order 30245): 34.174,24.549 34.047,24.549 33.266,23.403 34.12,22.173 34.974,23.403
MOSI_ADC on F.Cu "F.Cu-MOSI_ADC-1" (solid, remove dead copper, pour order 30357): 31.01,24.721 31.099,24.632 31.645,24.759 31.561,25.03 31.24,25.135
LDAC-DAC on F.Cu "F.Cu-LDAC-DAC" (solid, remove dead copper, pour order 30410): 44.593,19.498 44.593,19.371 44.809,19.219 45.026,19.435 44.809,19.651
MOSI_DAC on F.Cu "F.Cu-MOSI_DAC-1" (solid, remove dead copper, pour order 30405): 44.634,24.183 44.634,24.056 44.809,23.701 45.026,23.804 44.809,24.256
Net-(U1-PA02_A0_D0) on F.Cu "F.Cu-Net-(U1-PA02_A0_D0)" (solid, remove dead copper, pour order 30227): 22.387,4.25 22.514,4.25 24.097,4.634 23.96,6.01 22.96,6.38
5V5 on F.Cu "F.Cu-5V5-13" (solid, remove dead copper, pour order 30328): 19.926,19.366 19.926,19.493 19.371,19.746 19.239,19.429 19.371,19.112
3V3 on F.Cu "F.Cu-3V3-10" (solid, remove dead copper, pour order 30251): 28.726,20.189 29.234,20.189 29.894,20.946 29.04,22.175 28.186,20.946
FilteredSig on F.Cu "F.Cu-FilteredSig-1" (solid, remove dead copper, pour order 30355): 51.26,29.682 51.26,29.936 50.907,30.069 50.669,29.809 50.907,29.549
S- on F.Cu "F.Cu-S--1" (solid, remove dead copper, pour order 30225): 61.604,20.526 61.604,20.272 63.344,20.689 63.251,21.989 61.954,22.127
Net-(U1-PA11_A3_D3) on F.Cu "F.Cu-Net-(U1-PA11_A3_D3)-1" (solid, remove dead copper, pour order 30372): 32.814,4.539 32.687,4.539 32.49,4.186 32.75,3.948 33.01,4.186
SCLK_ADC on F.Cu "F.Cu-SCLK_ADC-2" (solid, remove dead copper, pour order 30421): 43.262,27.728 43.352,27.638 43.45,27.549 43.851,27.7 43.45,27.837
MOSI on F.Cu "F.Cu-MOSI-3" (solid, remove dead copper, pour order 30233): 32.604,24.199 32.477,24.199 31.125,23.549 31.58,22.173 32.58,21.948
Net-(IC3-RG_1) on F.Cu "F.Cu-Net-(IC3-RG_1)-1" (solid, remove dead copper, pour order 30407): 52.093,24.019 52.347,24.019 52.37,24.169 52.22,24.62 52.07,24.169
MOSI on F.Cu "F.Cu-MOSI-2" (solid, remove dead copper, pour order 30373): 32.477,23.609 32.604,23.609 32.8,23.962 32.54,24.2 32.28,23.962
3V3 on F.Cu "F.Cu-3V3-9" (solid, remove dead copper, pour order 30400): 39.576,28.495 39.756,28.315 40.143,28.564 40.051,28.79 39.575,28.564
"5V Reference" on F.Cu "F.Cu-5V Reference-4" (solid, remove dead copper, pour order 30415): 47.8,28.072 47.8,28.326 47.65,28.349 47.249,28.199 47.65,28.049
"DAC Bias" on F.Cu "F.Cu-DAC Bias-3" (solid, remove dead copper, pour order 30313): 47.472,19.562 47.472,19.308 48.11,19.256 48.111,19.599 47.868,19.842
"2V5 Ref" on F.Cu "F.Cu-2V5 Ref-2" (solid, remove dead copper, pour order 30213): 62.996,10.569 63.504,10.569 64.25,12.011 63.25,12.87 62.25,12.011
CS-ADC on F.Cu "F.Cu-CS-ADC-2" (solid, remove dead copper, pour order 30325): 44.094,26.895 43.967,26.895 43.713,26.34 44.03,26.208 44.347,26.34
Net-(U1-PA11_A3_D3) on F.Cu "F.Cu-Net-(U1-PA11_A3_D3)" (solid, remove dead copper, pour order 30235): 32.687,4.109 32.814,4.109 32.58,6.293 31.58,6.01 31.253,4.634
Net-(PS2-FB) on F.Cu "F.Cu-Net-(PS2-FB)-4" (solid, remove dead copper, pour order 30385): 20.316,20.999 20.443,20.999 20.65,21.302 20.38,21.54 20.11,21.302
"2V5 Ref" on F.Cu "F.Cu-2V5 Ref-1" (solid, remove dead copper, pour order 30294): 49.811,5.424 50.17,5.783 50.015,6.01 49.469,6.125 49.344,5.819
CS-MEM on F.Cu "F.Cu-CS-MEM-5" (solid, remove dead copper, pour order 30317): 32.849,30.186 32.849,29.932 33.023,29.458 33.341,29.589 33.471,29.906
3V3 on F.Cu "F.Cu-3V3-8" (solid, remove dead copper, pour order 30322): 31.144,4.073 31.144,3.946 31.699,3.692 31.831,4.009 31.699,4.326
GNDA on F.Cu "F.Cu-GNDA-35" (solid, remove dead copper, pour order 30283): 22.038,28.777 22.218,28.598 22.49,28.344 23.091,28.72 22.49,29.075
Net-(J3-CC) on F.Cu "F.Cu-Net-(J3-CC)-1" (solid, remove dead copper, pour order 30305): 19.543,10.525 19.797,10.525 19.997,11.078 19.68,11.21 19.363,11.078
CS-ADC on F.Cu "F.Cu-CS-ADC-1" (solid, remove dead copper, pour order 30330): 34.53,9.559 34.62,9.649 34.407,10.22 34.089,10.09 33.959,9.772
5V5 on F.Cu "F.Cu-5V5-12" (solid, remove dead copper, pour order 30280): 45.842,4.955 45.842,5.463 45.16,5.572 45.159,5.229 45.16,4.886
Net-(IC3-RG_2) on F.Cu "F.Cu-Net-(IC3-RG_2)-1" (solid, remove dead copper, pour order 30408): 52.593,24.019 52.847,24.019 52.87,24.169 52.72,24.62 52.57,24.169
"ADC DReady" on F.Cu "F.Cu-ADC DReady-3" (solid, remove dead copper, pour order 30247): 29.104,8.384 28.977,8.384 28.186,7.238 29.04,6.008 29.894,7.238
GNDA on F.Cu "F.Cu-GNDA-34" (solid, remove dead copper, pour order 30333): 20.97,22.999 21.06,22.909 21.631,23.122 21.501,23.44 21.183,23.57
"ADC DReady" on F.Cu "F.Cu-ADC DReady-2" (solid, remove dead copper, pour order 30347): 44.757,29.586 44.757,29.713 44.241,29.816 44.109,29.499 44.352,29.257
GNDA on F.Cu "F.Cu-GNDA-33" (solid, remove dead copper, pour order 30269): 24.345,30.125 24.705,30.484 24.282,31.032 24.039,30.79 23.798,30.547
GNDA on F.Cu "F.Cu-GNDA-32" (solid, remove dead copper, pour order 30363): 32.95,26.122 32.95,26.376 32.725,26.474 32.249,26.249 32.725,26.024
GNDA on F.Cu "F.Cu-GNDA-31" (solid, remove dead copper, pour order 30315): 19.797,8.786 19.543,8.786 19.248,8.402 19.49,8.158 19.833,8.159
GNDA on F.Cu "F.Cu-GNDA-30" (solid, remove dead copper, pour order 30350): 53.57,29.702 53.57,29.956 53.221,30.097 53.009,29.809 53.245,29.537
MISO_FLASH on F.Cu "F.Cu-MISO_FLASH" (solid, remove dead copper, pour order 30397): 31.537,28.756 31.627,28.666 31.775,28.564 32.251,28.79 31.775,28.961
5V5 on F.Cu "F.Cu-5V5-11" (solid, remove dead copper, pour order 30378): 19.79,19.493 19.79,19.366 20.143,19.199 20.381,19.459 20.141,19.717
GNDA on F.Cu "F.Cu-GNDA-29" (solid, remove dead copper, pour order 30298): 53.164,29.956 53.164,29.702 53.719,29.512 53.851,29.829 53.719,30.146
MOSI on F.Cu "F.Cu-MOSI-1" (solid, remove dead copper, pour order 30394): 30.204,23.46 30.294,23.55 30.49,23.799 30.209,24.03 29.957,23.78
GNDA on F.Cu "F.Cu-GNDA-28" (solid, remove dead copper, pour order 30367): 48.092,25.162 47.913,25.341 47.698,24.953 47.959,24.708 48.256,24.908
3V3 on F.Cu "F.Cu-3V3-7" (solid, remove dead copper, pour order 30314): 32.703,27.646 32.703,27.392 33.33,27.356 33.331,27.699 33.088,27.942
GNDA on F.Cu "F.Cu-GNDA-27" (solid, remove dead copper, pour order 30276): 52.696,8.845 52.696,9.353 52.01,9.442 52.009,9.099 52.01,8.756
"DAC Bias" on F.Cu "F.Cu-DAC Bias-2" (solid, remove dead copper, pour order 30404): 47.387,19.308 47.387,19.562 47.171,19.651 46.954,19.435 47.171,19.219
GNDA on F.Cu "F.Cu-GNDA-26" (solid, remove dead copper, pour order 30281): 53.73,20.973 53.73,20.465 54.41,20.346 54.411,20.689 54.41,21.032
S+ on F.Cu "F.Cu-S+" (solid, remove dead copper, pour order 30422): 53.386,24.253 53.566,24.433 53.37,24.678 53.219,24.62 53.366,24.241
3V3 on F.Cu "F.Cu-3V3-6" (solid, remove dead copper, pour order 30296): 39.807,29.636 39.627,29.816 39.029,29.666 39.159,29.348 39.402,29.107
"5V USB" on F.Cu "F.Cu-5V USB-3" (solid, remove dead copper, pour order 30257): 15.262,22.361 15.082,22.541 13.645,22.034 13.969,21.248 14.755,20.924
GNDA on F.Cu "F.Cu-GNDA-25" (solid, remove dead copper, pour order 30312): 32.824,26.376 32.824,26.122 33.504,26.265 33.374,26.582 33.13,26.824
MOSI_DAC on F.Cu "F.Cu-MOSI_DAC" (solid, remove dead copper, pour order 30352): 33.163,24.685 33.074,24.596 33.29,24.087 33.561,24.198 33.622,24.519
"2V5 Ref" on F.Cu "F.Cu-2V5 Ref" (solid, remove dead copper, pour order 30406): 46.489,30.068 46.309,30.248 46.225,30.049 46.299,29.648 46.45,29.638
GNDA on F.Cu "F.Cu-GNDA-24" (solid, remove dead copper, pour order 30270): 52.374,11.323 52.374,10.815 53.06,10.726 53.061,11.069 53.06,11.412
GNDA on F.Cu "F.Cu-GNDA-23" (solid, remove dead copper, pour order 30368): 20.936,22.785 20.846,22.875 20.313,22.829 20.379,22.558 20.7,22.423
"5V Reference" on F.Cu "F.Cu-5V Reference-3" (solid, remove dead copper, pour order 30229): 51.063,12.369 51.571,12.369 52.624,13.369 51.9,14.52 50.65,13.369
"DAC Bias" on F.Cu "F.Cu-DAC Bias-1" (solid, remove dead copper, pour order 30424): 47.303,26.912 47.557,26.912 47.521,27.049 47.25,27.2 47.167,27.049
GNDA on F.Cu "F.Cu-GNDA-22" (solid, remove dead copper, pour order 30414): 45.173,25.699 45.427,25.699 45.45,25.849 45.3,26.25 45.15,25.849
USB_D+ on F.Cu "F.Cu-USB_D+" (solid, remove dead copper, pour order 30258): 17.766,8.397 17.658,8.505 16.185,8.034 16.509,7.248 17.295,6.924
FilteredSig on F.Cu "F.Cu-FilteredSig" (solid, remove dead copper, pour order 30423): 47.596,28.865 47.416,29.045 47.188,28.849 47.249,28.698 47.612,28.849
"5V USB" on F.Cu "F.Cu-5V USB-2" (solid, remove dead copper, pour order 30380): 22.821,30.168 22.641,29.989 22.855,29.622 23.091,29.718 23.187,29.954
GNDA on F.Cu "F.Cu-GNDA-21" (solid, remove dead copper, pour order 30306): 51.074,25.942 51.074,26.196 50.521,26.376 50.389,26.059 50.521,25.742
SCLK_ADC on F.Cu "F.Cu-SCLK_ADC-1" (solid, remove dead copper, pour order 30343): 42.994,25.618 42.867,25.618 42.443,25.277 42.685,25.033 43.028,25.034
MISO on F.Cu "F.Cu-MISO-2" (solid, remove dead copper, pour order 30239): 34.373,24.549 34.246,24.549 33.266,23.403 34.12,22.173 35.082,23.24
3V3 on F.Cu "F.Cu-3V3-5" (solid, remove dead copper, pour order 30311): 39.832,28.392 39.653,28.571 39.089,28.369 39.219,28.052 39.537,27.921
GNDA on F.Cu "F.Cu-GNDA-20" (solid, remove dead copper, pour order 30297): 52.594,9.885 52.234,9.526 52.695,9.389 53.271,9.658 52.695,9.959
SCLK on F.Cu "F.Cu-SCLK-4" (solid, remove dead copper, pour order 30237): 37.854,24.091 37.727,24.091 36.31,23.549 36.66,22.173 37.66,21.9
BAT+ on F.Cu "F.Cu-BAT+-1" (solid, remove dead copper, pour order 30261): 43.941,9.927 43.582,9.568 44.12,8.541 44.721,8.788 44.698,9.66
"5V USB" on F.Cu "F.Cu-5V USB-1" (solid, remove dead copper, pour order 30287): 23.816,29.371 24.175,29.73 23.69,29.989 23.089,29.72 23.69,29.344
MISO on F.Cu "F.Cu-MISO-1" (solid, remove dead copper, pour order 30366): 41.902,27.116 42.029,27.116 42.235,27.525 41.965,27.698 41.695,27.542
SCLK_DAC on F.Cu "F.Cu-SCLK_DAC-1" (solid, remove dead copper, pour order 30395): 40.282,24.138 40.371,24.227 40.065,24.483 39.809,24.24 40.04,23.959